# Altium PCB Filtros.PcbDoc
Units mil, origin at the board's own origin, x right, y up, seen from the top; angles counter-clockwise.
Board outline 6000 x 4000 mil, 2 copper layers (Top Layer, Bottom Layer); 110 components, 173 nets, 310 pads, 40 vias.
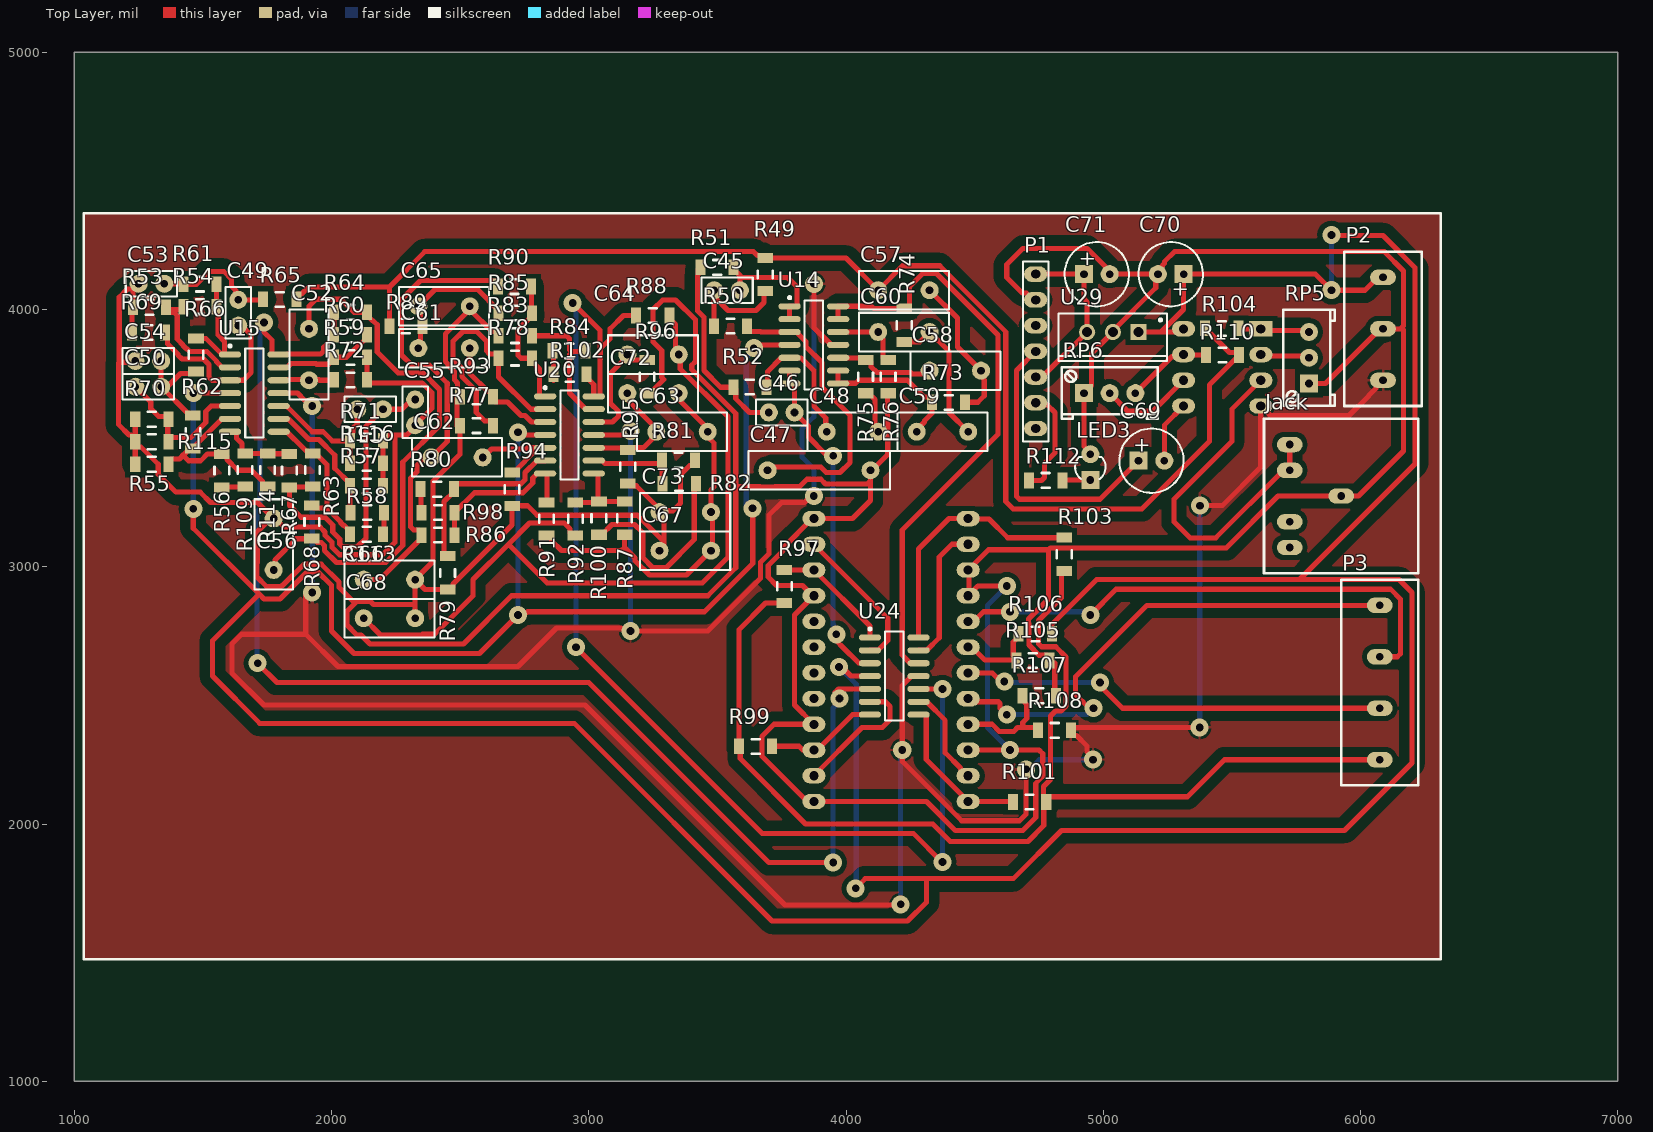
[diagram p0: Top Layer view]
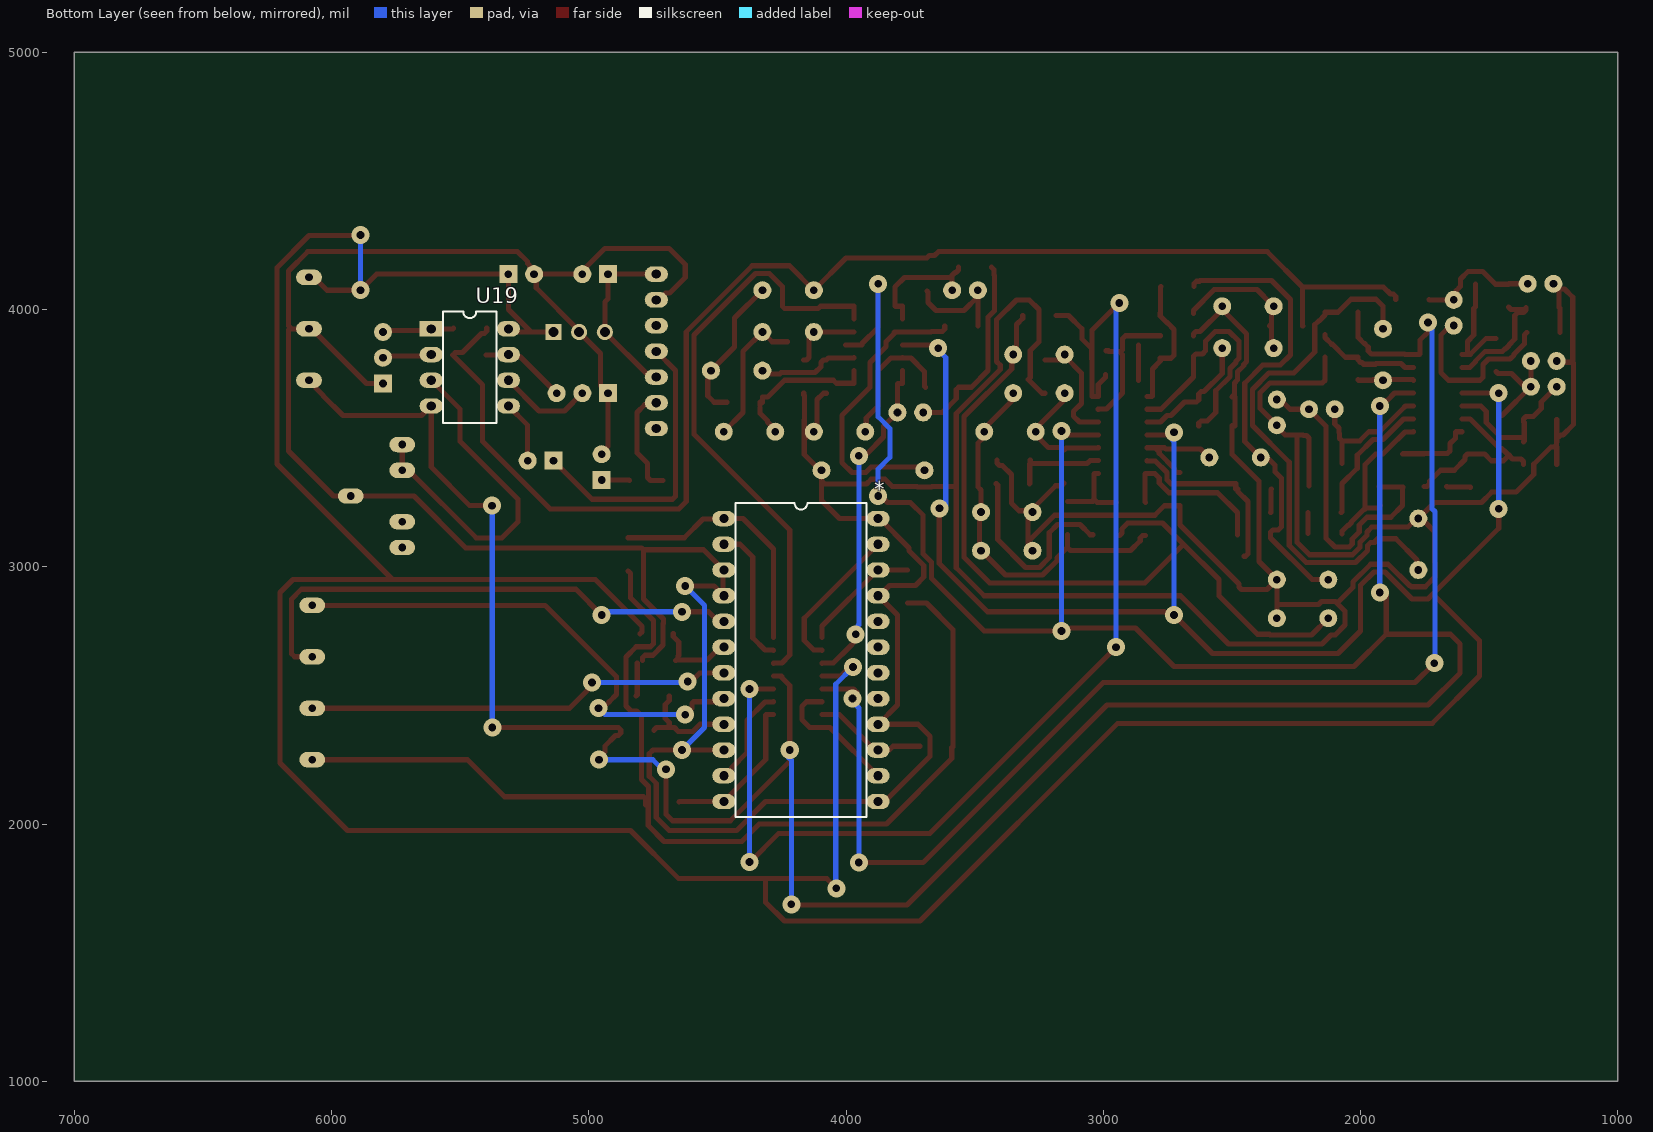
[diagram p1: Bottom Layer view, seen from below]

## Layer stack, top to bottom
Top Solder: solder mask 0.4, Solder Resist, Dk 3.5
Top Layer: signal copper 1.4
Dielectric 1: dielectric 12.6, FR-4, Dk 4.8
Bottom Layer: signal copper 1.4
Bottom Solder: solder mask 0.4, Solder Resist, Dk 3.5

## Board outline
1000,1000 7000,1000 7000,5000 1000,5000

## Design rules (kind name [scope] priority, off if disabled: settings)
Clearance [All] p1: gap=20 ignorepadtopadclearanceinfootprint=TRUE except(0: Arc-Hole Track-Hole SMDPad-Hole THPad-Hole Via-Hole Fill-Hole Poly-Hole Region-Hole Text-Hole; 10: Arc-Arc Arc-Track Arc-SMDPad Track-Track Track-SMDPad SMDPad-SMDPad SMDPad-THPad THPad-THPad; 40: Arc-Fill Arc-Poly Arc-Region Track-Fill Track-Poly Track-Region)
ComponentClearance [All] p1: gap=0 collisioncheckmode=3 verticalgap=0 showdistances=FALSE
PolygonConnect [All] p1: connectstyle=Relief reliefconductorwidth=10 reliefentries=4 polygonreliefangle="90 Angle" airgapwidth=10
RoutingVias [All] p1: holewidth=28 width=50 viastyle="Through Hole" minholewidth=28 minwidth=50 maxholewidth=28 maxwidth=50
SolderMaskExpansion [All] p1: expansion=4 istentingtop=FALSE
Width [All] p1: maxlimit=20 minlimit=20 preferedwidth=20 minimp=50.000000 maximp=50.000000 favimp=50.000000
29 further rules are at their usual default settings.

## Classes and differential pairs
component class "Pasa Banda Superior": C61 C62 C63 C64 C65 C66 C67 C68 C72 C73 R77 R78 R79 R80 R81 R82 R83 R84 R85 R86 R87 R88 R89 R90 R91 R92 R93 R94 R95 R96 R98 R100 R102 U20
component class "Pasa Banda Inferior": C49 C50 C51 C52 C53 C54 C55 C56 R53 R54 R55 R56 R57 R58 R59 R60 R61 R62 R63 R64 R65 R66 R67 R68 R69 R70 R71 R72 R109 R113 R114 R115 R116 U15
component class "Pasa Bajos": C45 C46 C47 C48 R49 R50 R51 R52 U14
component class "Pasa Altos": C57 C58 C59 C60 R73 R74 R75 R76
component class Ganancia: * R97 R99 R101 R103 R105 R106 R107 R108 U24
component class Filtros: C69 C70 C71 Jack LED3 P1 P2 P3 R104 R110 R112 RP5 RP6 U19 U29

## Components (designator, comment, footprint, x,y, rotation, side; value= is the part's Value field where it differs from the comment)
* "AD5206" DIP-24/D31 4175,2637.5 r270 bottom
C45 "Cap" rad-0.1 3537.5,4075 r0 top value=68nF
C46 "Cap" rad-0.1 3750,3600 r0 top value=150nF
C47 "Cap" rad-0.4 3895.14,3375 r180 top value=56nF
C48 "Cap" rad-0.2 4025,3525 r180 top value=22nF
C49 "Cap" rad-0.1 1637.5,3987.5 r270 top value=68nF
C50 "Cap" rad-0.1 1287.5,3700 r180 top value=33nF
C51 "Cap" rad-0.1 2150,3612.5 r180 top value=150nF
C52 "Cap" rad-0.2 1912.5,3825 r270 top value=22nF
C53 "Cap" rad-0.1 1300,4100 r0 top value=68nF
C54 "Cap" rad-0.1 1287.5,3800 r0 top value=33nF
C55 "Cap" rad-0.1 2325,3600 r90 top value=150nF
C56 "Cap" rad-0.2 1775,3087.5 r270 top value=22nF
C57 "Cap" rad-0.2 4225,4075 r180 top value=2.7nF
C58 "Cap" rad-0.2 4425,3762.5 r0 top value=2.7nF
C59 "Cap" rad-0.2 4375,3525 r180 top value=6.8nF
C60 "Cap" rad-0.2 4225,3912.5 r0 top value=6.8nF
C61 "Cap" rad-0.2 2437.5,3850 r0 top value=10nF
C62 "Cap" rad-0.2 2487.5,3425 r0 top value=4.7nF
C63 "Cap" rad-0.2 3362.5,3525 r180 top value=22nF
C64 "Cap" rad-0.2 3250,3825 r180 top value=3.3nF
C65 "Cap" rad-0.2 2437.5,4012.5 r180 top value=10nF
C66 "Cap" rad-0.2 2225,2950 r180 top value=4.7nF
C67 "Cap" rad-0.2 3375,3062.5 r0 top value=22nF
C68 "Cap" rad-0.2 2225,2800 r180 top value=3.3nF
C69 "Cap Pol1" "CAPR D250 H450 R100 mil" 5187.5,3412.5 r0 top value=10uF
C70 "Cap Pol1" "CAPR D250 H450 R100 mil" 5262.5,4137.5 r180 top value=10uF
C71 "Cap Pol1" "CAPR D250 H450 R100 mil" 4975,4137.5 r0 top value=10uF
C72 "Cap" rad-0.2 3250,3675 r180 top value=4.7nF
C73 "Cap" rad-0.2 3375,3212.5 r0 top value=4.7nF
Jack "Jack 3.5mm" "jack 3.5mm" 5725,3475 r270 top
LED3 "Diodo Led" "Led 3mm AMARILLO" 4950,3387.5 r90 top
P1 "Bluetooth audio" HDR1X7 4737.5,3537.5 r90 top
P2 "Header 3" "Bornera 3" 6087.5,4125 r270 top
P3 "Header 4" "Bornera 4" 6075,2250 r90 top
R49 "Res2" "1206 resistor" 3687.5,4137.5 r270 top value=10K
R50 "Res2" "1206 resistor" 3550,3937.5 r0 top value=10K
R51 "Res2" "1206 resistor" 3500,4162.5 r180 top value=10K
R52 "Res2" "1206 resistor" 3625,3700 r0 top value=10K
R53 "Res2" "1206 resistor" 1291,4010.5 r0 top value=10K
R54 "Res2" "1206 resistor" 1487.5,4012.5 r0 top value=10K
R55 "Res2" "1206 resistor" 1300,3400 r0 top value=10K
R56 "Res2" "1206 resistor" 1575,3375 r270 top value=10K
R57 "Res2" "1206 resistor" 2137.5,3312.5 r180 top value=10K
R58 "Res2" "1206 resistor" 2137.5,3212.5 r0 top value=10K
R59 "Res2" "1206 resistor" 2075,3812.5 r180 top value=10K
R60 "Res2" "1206 resistor" 2075,3900 r180 top value=22K
R61 "Res2" "1206 resistor" 1487.5,4100 r0 top value=5.2K
R62 "Res2" "1206 resistor" 1462.5,3525 r270 top value=5.6K
R63 "Res2" "1206 resistor" 1925,3375 r90 top value=2.7K
R64 "Res2" "1206 resistor" 2075,3987.5 r180 top value=8.2K
R65 "Res2" "1206 resistor" 1800,4037.5 r180 top value=10K
R66 "Res2" "1206 resistor" 1475,3825 r270 top value=10K
R67 "Res2" "1206 resistor" 1837.5,3375 r270 top value=10K
R68 "Res2" "1206 resistor" 1925,3175 r270 top value=10K
R69 "Res2" "1206 resistor" 1287.5,3912.5 r0 top value=6.8K
R70 "Res2" "1206 resistor" 1300,3575 r0 top value=15K
R71 "Res2" "1206 resistor" 2137.5,3487.5 r180 top value=8.2K
R72 "Res2" "1206 resistor" 2075,3725 r180 top value=8.2K
R73 "Res2" "1206 resistor" 4400,3637.5 r180 top value=8.2K
R74 "Res2" "1206 resistor" 4225,3937.5 r90 top value=1.5K
R75 "Res2" "1206 resistor" 4075,3737.5 r90 top value=10K
R76 "Res2" "1206 resistor" 4162.5,3737.5 r90 top value=10K
R77 "Res2" "1206 resistor" 2562.5,3550 r0 top value=10K
R78 "Res2" "1206 resistor" 2712.5,3812.5 r0 top value=10K
R79 "Res2" "1206 resistor" 2450,2975 r90 top value=10K
R80 "Res2" "1206 resistor" 2412.5,3300 r180 top value=10K
R81 "Res2" "1206 resistor" 3350,3412.5 r180 top value=10K
R82 "Res2" "1206 resistor" 3350,3325 r0 top value=10K
R83 "Res2" "1206 resistor" 2712.5,3900 r0 top value=10K
R84 "Res2" "1206 resistor" 2925,3837.5 r180 top value=22K
R85 "Res2" "1206 resistor" 2712.5,3987.5 r0 top value=1K
R86 "Res2" "1206 resistor" 2412.5,3125 r0 top value=1K
R87 "Res2" "1206 resistor" 3137.5,3187.5 r90 top value=1K
R88 "Res2" "1206 resistor" 3250,3975 r180 top value=1K
R89 "Res2" "1206 resistor" 2287.5,3937.5 r0 top value=10K
R90 "Res2" "1206 resistor" 2712.5,4087.5 r180 top value=10K
R91 "Res2" "1206 resistor" 2837.5,3187.5 r270 top value=10K
R92 "Res2" "1206 resistor" 2950,3187.5 r270 top value=10K
R93 "Res2" "1206 resistor" 2562.5,3662.5 r0 top value=8.2K
R94 "Res2" "1206 resistor" 2700,3300 r90 top value=10K
R95 "Res2" "1206 resistor" 3150,3387.5 r90 top value=4.7K
R96 "Res2" "1206 resistor" 3225,3737.5 r90 top value=10K
R97 "Res2" "1206 resistor" 3762.5,2925 r270 top value=10K
R98 "Res2" "1206 resistor" 2412.5,3212.5 r0 top value=2.7K
R99 "Res2" "1206 resistor" 3650,2300 r180 top value=10K
R100 "Res2" "1206 resistor" 3037.5,3187.5 r90 top value=1.5K
R101 "Res2" "1206 resistor" 4712.5,2087.5 r0 top value=10K
R102 "Res2" "1206 resistor" 2925,3750 r0 top value=4.7K
R103 "Res2" "1206 resistor" 4850,3050 r270 top value=10K
R104 "Res2" "1206 resistor" 5462.5,3925 r180 top value=10K
R105 "Res2" "1206 resistor" 4725,2637.5 r0 top value=3.3K
R106 "Res2" "1206 resistor" 4737.5,2737.5 r180 top value=10K
R107 "Res2" "1206 resistor" 4750,2500 r0 top value=3.3K
R108 "Res2" "1206 resistor" 4812.5,2362.5 r180 top value=10K
R109 "Res2" "1206 resistor" 1662.5,3375 r90 top value=1K
R110 "Res2" "1206 resistor" 5462.5,3825 r0 top value=10K
R112 "1K" "1206 resistor" 4775,3337.5 r0 top
R113 "Res2" "1206 resistor" 2137.5,3125 r180 top value=1K
R114 "Res2" "1206 resistor" 1750,3375 r90 top value=1K
R115 "Res2" "1206 resistor" 1300,3487.5 r0 top value=15K
R116 "Res2" "1206 resistor" 2137.5,3400 r180 top value=8.2K
RP5 "Trimpot" "Trimpot Multivuelta Vertical" 5800,3812.5 r270 top
RP6 "Trimpot" "Trimpot Multivuelta Vertical" 5025,3675 r180 top
U14 "TL084ACD" 751A-02_N 3875,3862.5 r0 top
U15 "TL084ACD" 751A-02_N 1700,3675 r0 top
U19 "TL082ACJG" 693-02 5462.5,3775 r270 bottom
U20 "TL084ACD" 751A-02_N 2925,3512.5 r0 top
U24 "TL084ACD" 751A-02_N 4187.5,2575 r0 top
U29 "LM78M05CT/NOPB" T03B 5037.5,3912.5 r180 top

## Footprints (in the part's own frame and the unit in brackets; to place one, negate y for a bottom-side part, rotate by r counter-clockwise, add the part's x,y. Pads: shape width x height; smd on the part's side, far side on the other; paste and mask are expansions set on the pad)
693-02 [mil] "DIP; 8 Leads; Row Spacing 7.62 mm; Pitch 2.54 mm"
  rect 60x90 hole 35.43: 1(-150,-150)
  oval 60x90 hole 35.43: 2(-50,-150) 3(50,-150) 4(150,-150) 5(150,150) 6(50,150) 7(-50,150) 8(-150,150)
  silkscreen extent -217,-104 217,104
751A-02_N [mm] "SOIC, 14-Leads, Body 8.7x3.9mm, Pitch 1.27mm, IPC Medium Density"
  oval 2.2x0.6 smd: 1(-2.4,3.81) 2(-2.4,2.54) 3(-2.4,1.27) 4(-2.4,0) 5(-2.4,-1.27) 6(-2.4,-2.54) 7(-2.4,-3.81) 8(2.4,-3.81) 9(2.4,-2.54) 10(2.4,-1.27) 11(2.4,0) 12(2.4,1.27) 13(2.4,2.54) 14(2.4,3.81)
  silkscreen extent -2.52,-4.4 0.9,4.78, body extent -1.95,-4.33 1.95,4.33, height 1.75
"1206 resistor" [mil]
  rect 39x61 smd: 1(-63,-2) 2(66,-2)
  silkscreen extent -14,-30 16,27
"Bornera 3" [mil]
  oval 60x100 hole 30: 1(0,0) 2(200,0) 3(400,0)
  silkscreen extent -100,-150 500,150
"Bornera 4" [mil]
  oval 60x100 hole 30: 1(0,0) 2(200,0) 3(400,0) 4(600,0)
  silkscreen extent -100,-150 700,150
"CAPR D250 H450 R100 mil" [mil]
  rect 70x70 hole 30: 1(-50,0)
  round 70 hole 30: 2(50,0)
  silkscreen extent -125,-125 125,125, body extent -134,-133 133,133, height 98
DIP-24/D31 [mil]
  oval 60x90 hole 35.43: 1(-550,-300) 2(-450,-300) 3(-350,-300) 4(-250,-300) 5(-150,-300) 6(-50,-300) 7(50,-300) 8(150,-300) 9(250,-300) 10(350,-300) 11(450,-300) 12(550,-300) 13(550,300) 14(450,300) 15(350,300) 16(250,300) 17(150,300) 18(50,300) 19(-50,300) 20(-150,300) 21(-250,300) 22(-350,300) 23(-450,300) 24(-550,300)
  silkscreen extent -610,-254 610,254
HDR1X7 [mil] "Connector; Header; 7 Position"
  oval 60x90 hole 35.43: 1(0,0) 2(100,0) 3(200,0) 4(300,0) 5(400,0) 6(500,0) 7(600,0)
  silkscreen extent -50,-50 650,50
"jack 3.5mm" [mil]
  oval 60x100 hole 30: 1(0,0) 1(100,0) 2(300,0) 2(400,0) 3(200,200)
  Top Layer region: 400,400
  silkscreen extent -100,-100 500,500
"Led 3mm AMARILLO" [mil]
  rect 70x70 hole 30: 1(-50,0)
  round 70 hole 30: 2(50,0)
  silkscreen extent -47,-59 39,59, body extent -65,-65 65,64, height 217
rad-0.1 [mil] "Radial Cap, Thru-Hole; 2 Leads; 0.1 in Pin Spacing"
  round 70 hole 30: 1(-50,0) 2(50,0)
  silkscreen extent -100,-50 100,50
rad-0.2 [mil] "Radial Cap, Thru-Hole; 2 Leads; 0.2 in Pin Spacing"
  round 70 hole 30: 1(-100,0) 2(100,0)
  silkscreen extent -175,-75 175,75
rad-0.4 [mil] "Radial Cap, Thru-Hole; 2 Leads; 0.4 in Pin Spacing"
  round 70 hole 30: 1(-200,0) 2(200,0)
  silkscreen extent -275,-75 275,75
T03B [mm] "TO, Thru-Hole, Vertical, Heatsink Mounted; 3 In-Line Leads; Pitch 2.54 mm"
  rect 1.6x1.6 hole 1: 1(-2.54,0)
  round 1.6 hole 1: 2(0,0) 3(2.54,0)
  silkscreen extent -5.35,-1.85 5.35,2.85, body extent -5.4,-1.9 5.4,2.9, height 19.4
"Trimpot Multivuelta Vertical" [mil] "Preset Multivuelta de ajuste vertical"
  rect 70x70 hole 30: 1(100,0)
  round 70 hole 30: 2(-100,0) 3(0,0)
  silkscreen extent -187,-100 187,100, body extent -181,-95 181,94, height 475

## Part data
C45 C46 C47 C48 C49 C50 C51 C52 C53 C54 C55 C56 C57 C58 C59 C60 C61 C62 C63 C64 C65 C66 C67 C68 C72 C73: "Capacitor", LatestRevisionDate=17-Jul-2002, LatestRevisionNote="Re-released for DXP Platform.", PackageDescription="Radial Cap, Thru-Hole; 2 Leads; 0.3 in Pin Spacing", PackageReference=RAD-0.3, Published=8-Jun-2000, Publisher="Altium Limited"
C69 C70 C71: "Polarized Capacitor (Radial)", LatestRevisionDate=17-Jul-2002, LatestRevisionNote="Re-released for DXP Platform.", PackageDescription="Polarized Capacitor (Radial); 2 Leads", PackageReference=RB7.6-15, Published=8-Jun-2000, Publisher="Altium Limited"
LED3: "Led 3mm", VALOR="Led Xmm (COLOR)"
P1: library part "Header 7", "Header, 7-Pin", LatestRevisionDate=17-Jul-2002, LatestRevisionNote="Re-released for DXP Platform.", Publisher="Altium Limited"
P2: "Header, 3-Pin", LatestRevisionDate=17-Jul-2002, LatestRevisionNote="Re-released for DXP Platform.", Publisher="Altium Limited"
P3: "Header, 4-Pin", LatestRevisionDate=17-Jul-2002, LatestRevisionNote="Re-released for DXP Platform.", Publisher="Altium Limited"
R49 R50 R51 R52 R53 R54 R55 R56 R57 R58 R59 R60 R61 R62 R63 R64 R65 R66 R67 R68 R69 R70 R71 R72 R73 R74 R75 R76 R77 R78 R79 R80 R81 R82 R83 R84 R85 R86 R87 R88 R89 R90 R91 R92 R93 R94 R95 R96 R97 R98 R99 R100 R101 R102 R103 R104 R105 R106 R107 R108 R109 R110 R113 R114 R115 R116: "Resistor", LatestRevisionDate=17-Jul-2002, LatestRevisionNote="Re-released for DXP Platform.", PackageDescription="Axial Device, Thru-Hole; 2 Leads; 0.4 in Pin Spacing", PackageReference=AXIAL-0.4, Published=8-Jun-2000, Publisher="Altium Limited"
R112: library part Res2, "Resistor", LatestRevisionDate=17-Jul-2002, LatestRevisionNote="Re-released for DXP Platform.", PackageDescription="Axial Device, Thru-Hole; 2 Leads; 0.4 in Pin Spacing", PackageReference=AXIAL-0.4, Published=8-Jun-2000, Publisher="Altium Limited"
RP5 RP6: "Preset", VALOR=1K
U14 U15 U19 U20 U24: "JFET-Input Operational Amplifier", ComponentLink1Description="Manufacturer Link", ComponentLink1URL=http://www.onsemi.com/site/products/parametrics/0,4446,251,00.html, DatasheetVersion=1988, Published=17-Jul-2002, Publisher="Altium Limited"
  U14 U15 U20 U24: Code_IPC=SOIC127P600-14, LatestRevisionDate=13-Apr-2006, LatestRevisionNote="IPC-7351 Footprint Added.", PackageDescription="14-Pin Small Outline Integrated Circuit 1.27 mm Pitch", PackageReference=751A-02, PackageVersion=1991
  U19: Code_JEDEC=MO-001-AN, LatestRevisionDate=06-Jun-2005, LatestRevisionNote="Stylized 3D Model Added.", PackageDescription="DIP; 8 Leads; Row Spacing 7.62 mm; Pitch 2.54 mm", PackageReference=693-02
U29: "3-Terminal Positive Voltage Regulators, 3-pin TO-220, Pb-Free", Manufacturer="National Semiconductor", PackageTopMarking=NSUZXYTTE#*LM341T-5.0*LM78M05CT, PowerWise=N, Supplier Part Number 1=LM78M05CT-ND, ComponentLink1Description="LM78M05 Datasheet", ComponentLink1URL=http://www.national.com/ds/LM/LM78M05.pdf, ComponentLink2Description="LM78M05 Web Page", ComponentLink2URL=http://www.national.com/pf/LM/LM78M05.html, ComponentLink3Description="T03B Package Page", ComponentLink3URL=http://www.national.com/packaging/folders/t03b.html, CompType="LDO IC", DatasheetVersion=Aug-2005, PackageDescription="TO-220, Molded, 3 Lead, Straight", PackageReference=T03B, PackageVersion="revL, Jan-1992", PartNumber=LM78M05CT/NOPB, PinCount=3, Published=1-Mar-2010, Publisher="Altium Limited", RoHS=Y, Supplier 1=Digi-Key, Supplier 2=Farnell, Supplier Part Number 2=1685493

## Via types
v1: diameter 70, hole 30, Top Layer to Bottom Layer, 40 vias

## Nets (pads, with @x,y where several pads share a name; then routed paths per layer and width w, separated by ;. In a path a pad name is that pad's centre, name@x,y a point inside that pad or via, vN(x,y) a via of type N, cw(c..) or ccw(c..) an arc to the next point about the centre after c; other vN are vias at no path point)
12V: *.3 *.4 *.10 *.13 *.16 *.21 *.24 C47.1 C48.1 C53.1 C54.1 C55.1 C56.1 C65.1 C66.1 C67.1 C68.1 C70.2 C71.2 C73.1 Jack.3 LED3.2 P1.6 P2.2 R53.1 R55.1 R57.1 R59.1 R69.1 R70.1 R71.1 R72.1 R75.1 R76.1 R77.1 R79.1 R81.1 R83.1 R93.1 R94.1 R95.1 R96.1 R105.2 R107.2 R115.1 R116.1 RP5.1 RP6.1 U29.2 | length 23329.3
  Top Layer w20: C53.1@1222.64,4080.02 1207.09,4080.02 1175,4047.93 1175,3794.79 ; R69.1 1224.5,4005 R53.1 1228,4074.66 1250,4096.66 C53.1 ; R115.1@1227.5,3506 1221,3512.5 1212.5,3512.5 1172.5,3552.5 1172.5,3792.29 1175,3794.79 ; R55.1 R115.1@1237,3465 ; R115.1 1237,3506 R70.1 ; C54.1 1232.29,3794.79 1175,3794.79 ; R115.1@1238.25,3485.5 1238.25,3473.25 1246.5,3465 1260,3465 1326.5,3398.5 1326.5,3359.22 1395.72,3290 1489.42,3290 1529.42,3250 1712.5,3250 C56.1@1768.75,3193.75 ; C56.1 1762.5,3187.5 1762.5,3182.37 1755.96,3175.83 1750.83,3175.83 1712.5,3137.5 1712.5,3016.92 1710,3014.42 1710,2960.58 1748.08,2922.5 1801.92,2922.5 1804.42,2925 1807.57,2925 1892.57,3010 1960.21,3010 2029.69,2940.52 2029.69,2919.48 2091.12,2858.05 ; C56.1@1782.37,3187.5 1815.87,3154 1956.28,3154 1975,3135.28 1975,3122.63 2002,3095.63 2002,3075.79 2031.29,3046.5 2198.28,3046.5 2247,3095.22 2247,3512.5 ; R59.1 R72.1 2138,3724.5 2147.5,3715 2351.92,3715 2390,3676.92 2390,3615 C55.1 2325,3544.87 2292.63,3512.5 2247,3512.5 ; R57.1 R116.1 R71.1 2200.5,3500.5 2210,3510 2221,3510 2223.5,3512.5 2247,3512.5 ; C68.1 2325,2853.62 ; R93.1@2488.11,3660.5 2488.11,3548 R77.1 2499.5,3437 2395,3332.5 2395,3020 C66.1 ; R93.1 2490,3670 2490,3714.15 2477.5,3726.65 2477.5,3758.12 2453.88,3781.74 2453.88,3786.77 2442.5,3798.15 2442.5,3905 C65.1@2537.5,4000 ; C65.1 C65.1@2537.5,4000 ; R83.1 2649.5,3904.72 2640,3914.22 2623.28,3914.22 C65.1@2537.5,4000 ; R95.1 3161.5,3315 3185,3315 3268.31,3231.69 3268.31,3219.19 C73.1@3279.34,3208.16 ; R96.1 3238,3674.5 3291.62,3728.12 3283.88,3735.87 3283.88,3841.12 3250,3875 3250,4000 3287.5,4037.5 3337.5,4037.5 3415,3960 3415,3798.08 3400.46,3783.54 3400.46,3766.97 3571.12,3596.3 3571.12,3320.26 3575,3316.38 3571.12,3312.5 ; C67.1 3289.85,3077.35 3291.84,3077.35 3291.84,3097.87 ; C73.1 C73.1@3279.34,3208.16 ; C73.1@3291.84,3217.71 3327.58,3217.71 3357.09,3247.22 3357.09,3358.59 3392.5,3394 3403.5,3394 3413,3403.5 R81.1 ; *.21@3867.53,2887.5 3867.53,2880.03 3800,2812.5 3800,2462.5 *.16 3720.22,2387.5 3673.5,2340.78 3673.5,2263.22 3849.22,2087.5 *.13 4312.5,2087.5 4425,1975 4687.5,1975 4737.5,2025 4737.5,2158.08 4765,2185.58 4765,2273.28 4750.78,2287.5 v1(4637.5,2287.5) *.10 ; *.21 3871,2887.5 3830.91,2927.59 3730.12,2927.59 3697.5,2960.22 3697.5,3005.07 3755,3062.57 3755,3073.28 *.24@3869.22,3187.5 ; *.24 *.24@3869.22,3187.5 ; R75.1 4088,3674.5 4112.19,3650.31 4112.19,3552.05 4125,3539.23 C48.1 ; C48.1@4132.37,3525 4162.5,3494.87 ; R76.1 4164.5,3668.49 4161.01,3665 4161.01,3571.57 4162.5,3570.08 4162.5,3494.87 ; *.10@4467.53,2294.97 *.10@4467.53,2305.54 ; v1(4625,2925) 4512.5,2925 4477.99,2890.49 4477.99,2984.51 *.3 4553.74,3066.24 4787.5,3066.24 ; P1.6 4726.93,4037.5 4700.76,4063.68 4686.32,4063.68 4625,4125 4625,4175 4687.5,4237.5 4937.5,4237.5 5016.77,4158.23 5016.77,4145.73 C71.2 5204.27,4137.5 C70.2 ; R105.2 4791,2646.5 4781.5,2656 4750.79,2656 4711,2695.79 4711,2778.28 4709.18,2780.11 4709.18,2796.68 4787.5,2875 4787.5,3066.24 ; 4811.61,2625 4811.61,2502.39 R107.2 ; LED3.2 4950,3443.74 4925,3468.74 RP6.1 4954.37,3704.37 4954.37,3829.37 U29.2 5037.5,3917.92 5204.27,4084.69 5204.27,4129.27 C70.2 ; RP5.1 5864.22,3712.5 6070.47,3918.75 P2.2@6087.5,3918.75 ; P2.2 6102.93,3925 6162.5,3925 6167.5,3920 6167.5,3450 5992.5,3275 Jack.3 5679.93,3275 5478.43,3073.5 4794.76,3073.5 4787.5,3066.24 ; 6155.78,3925 6167.5,3936.72 6167.5,4149.85 6092.35,4225 5276.99,4225 5237.5,4185.51 5237.5,4178.5 5230.46,4171.46 5230.46,4168.99 5212.5,4151.03 C70.2 ; 2325,2853.62 2163.3,2853.62 2151.92,2865 2098.08,2865 2060,2826.92 2060,2773.08 2098.08,2735 2114.17,2735 2149.17,2700 2512.5,2700 2700,2887.5 3462.5,2887.5 3571.12,2996.12 3571.12,3312.5 ; 2325,2853.62 C66.1 ; C66.1 2363,2912 R79.1 2463,2912 2472.5,2921.5 2472.5,2932.5 2702,3162 R94.1 2762.5,3237 2799.5,3200 3189.72,3200 3291.84,3097.87 ; C73.1@3279.34,3208.16 3291.84,3208.16 3291.84,3097.87 ; 3571.12,3312.5 3665.72,3312.5 3668.22,3310 3722.06,3310 3724.56,3312.5 3820.58,3312.5 3848.08,3340 3901.92,3340 3920.55,3321.38 4082.25,3321.38 4095.14,3334.26 ; *.24@3869.22,3187.5 4025,3187.5 4095.14,3257.64 4095.14,3334.26 ; 4095.14,3334.26 C47.1 4101.59,3375 4162.5,3435.91 4162.5,3494.87
  Bottom Layer w20: v1(4625,2925) 4550,2850 4550,2375 v1(4637.5,2287.5)
24V: C70.1 P2.1 R106.1 U14.4 U15.4 U19.8 U20.4 U24.4 U29.1 | length 17742.9
  Top Layer w20: v1(1462.5,3225) 1462.5,3150 1718.75,2893.75 ; v1(1462.5,3675) U15.4 ; v1(2725,3522.5) 2738.53,3522.5 2748.53,3512.5 U20.4 ; v1(3636.12,3227.18) 3637.5,3225.81 3637.5,3012.5 3450,2825 2761.72,2825 2758.78,2822.07 2734.57,2822.07 v1(2725,2812.5) 2575,2662.5 2087.5,2662.5 1999.69,2750.31 1999.69,2928.09 1947.78,2980 1905,2980 1800,2875 1737.5,2875 1718.75,2893.75 ; v1(3641.89,3850) 3658.78,3850 3671.28,3862.5 U14.4 ; v1(3972.79,2610.29) 3984.42,2610.29 4019.7,2575 U24.4 ; v1(4037.5,1750) 4075,1787.5 4312.5,1787.5 ; R106.1 4793.43,2746.57 4793.43,2768.43 4975,2950 5762.5,2950 ; U29.1 5225,3912.5 ; U19.8 5305.03,3917.53 5278,3917.53 5272.97,3912.5 5225,3912.5 ; v1(5887.5,4290) 5890,4287.5 6087.5,4287.5 6212.5,4162.5 6212.5,3400 5762.5,2950 ; v1@5893.24,4069.26 5825,4137.5 C70.1 5312.5,4000 5225,3912.5 ; v1@5893.24,4072.62 5895.62,4075 6017.5,4075 6067.5,4125 P2.1 ; 1718.75,2893.75 1537.5,2712.5 1537.5,2575 1721.21,2391.29 2943.71,2391.29 3712.5,1622.5 4239.42,1622.5 4312.5,1695.58 4312.5,1787.5 ; 4312.5,1787.5 4650,1787.5 4837.5,1975 5937.5,1975 6200,2237.5 6200,2900 6150,2950 5762.5,2950
  Bottom Layer w20: v1(1462.5,3225) v1(1462.5,3675) ; v1(2725,2812.5) 2725,3485.78 2728.01,3488.79 2728.01,3519.49 v1(2725,3522.5) ; v1(3636.12,3227.18) 3624.22,3227.18 3612.5,3238.9 3612.5,3813.28 3641.89,3842.68 v1(3641.89,3850) ; v1(3972.79,2610.29) 4040,2543.08 4040,1757.8 4037.5,1755.3 v1(4037.5,1750) ; v1(5887.5,4075) v1(5887.5,4290)
32V: 
64V: 
A1: *.22 R97.1 U24.1 | length 468.2
  Top Layer w20: R97.1 3760.75,2987.75 3874.75,2987.75 *.22 ; *.22@3874.5,2988 4093.01,2769.49 U24.1
A2: *.15 R99.1 U24.7 | length 443
  Top Layer w20: R99.1 3817.47,2302 3831.97,2287.5 3885.57,2287.5 3898.63,2300.56 3900.56,2300.56 4025,2425 U24.7
A3: *.12 R101.1 U24.8 | length 609.4
  Top Layer w20: U24.8 4310.31,2425 4311.99,2423.33 4311.99,2250.51 *.12 4647.5,2087.5 R101.1
A4: *.1 R103.1 U24.14 | length 990.2
  Top Layer w20: U24.14 4281.99,3069.49 4400,3187.5 *.1 4477,3185.5 4556.01,3185.5 4628.51,3113 R103.1
Bluetooth: C69.2 U19.5 | length 243.6
  Top Layer w20: C69.2 5237.5,3550 U19.5
CLK: *.8 P3.4 | length 1994.4
  Top Layer w20: *.8 4482.47,2480.03 4501.22,2480.03 4506.24,2475 4592.5,2475 4599.26,2468.24 4599.26,2448.37 4622.63,2425 v1(4625,2425) ; v1(4962.5,2450) 4945.62,2450 4920.62,2475 4892.5,2503.12 4892.5,2572.78 5169.72,2850 P3.4
  Bottom Layer w20: v1(4625,2425) 4937.5,2425 4950,2437.5 v1(4962.5,2450)
CS: *.5 P3.3 | length 2055.7
  Top Layer w20: *.5 4496.72,2787.5 4534.22,2825 v1(4637.5,2825) ; v1(4950,2812.5) 5050,2912.5 6117.35,2912.5 6155,2874.85 6155,2661.72 6143.28,2650 P3.3
  Bottom Layer w20: v1(4637.5,2825) 4937.5,2825 v1(4950,2812.5)
GND: P2.3 R108.1 U14.11 U15.11 U19.4 U20.11 U24.11 | length 13777
  Top Layer w20: U15.11 1867.8,3675 1897.05,3645.74 1941.76,3645.74 1933.52,3637.5 1925,3646.02 v1(1925,3625) ; v1(1925,2900) 1925,2920.5 1900,2895.5 1900,2737.5 ; U20.11 3141.88,3512.5 3154.38,3525 3159.5,3525 v1(3162.5,3528) ; v1(3875,3275) 3863.28,3275 3838.28,3250 3750,3250 3700,3200 3700,3050 3667.5,3017.5 3667.5,2955 3462.5,2750 v1(3162.5,2750) 3152.93,2759.57 3128.72,2759.57 3125.78,2762.5 2875,2762.5 2725,2612.5 2025,2612.5 1900,2737.5 ; v1(3875,4100) 3875,3930.5 3937.3,3868.21 3937.3,3864.17 3938.97,3862.5 U14.11 U14.11@4001.96,3862.5 ; v1(4212.5,1687.5) 4212.5,1711.72 4185.78,1685 3762.5,1685 2985,2462.5 1737.5,2462.5 1612.5,2587.5 1612.5,2700 1650,2737.5 1900,2737.5 ; U24.11 4251.47,2575 4249.8,2573.33 4249.8,2569.29 4218.68,2538.18 v1(4218.68,2287.5) 4218.68,2243.82 4450,2012.5 4675,2012.5 4700,2037.5 v1(4700,2212.5) ; R108.1 R108.1@4875.5,2365.5 ; v1(4960,2250.05) 4960,2258.17 4937.5,2280.67 4937.5,2302.5 4896,2344 4885,2344 4875.5,2353.5 R108.1@4875.5,2365.5 ; v1(5375,2375) 4885,2375 R108.1@4875.5,2365.5 ; v1(5375.86,3237.5) 5462.5,3237.5 5612.5,3387.5 U19.4 5650,3587.5 5955,3587.5 6033.8,3666.3 6033.8,3667.97 6059.85,3694.02 6059.85,3706.52 6078.32,3725 P2.3
  Bottom Layer w20: v1(1925,2900) v1(1925,3625) ; v1(3162.5,2750) v1(3162.5,3528) ; v1(3875,3275) 3875,3380.16 3829.58,3425.58 3829.58,3537.66 3875,3583.08 v1(3875,4100) ; v1(4212.5,1687.5) 4212.5,2248.28 4225,2260.78 4224.42,2261.36 4224.42,2281.76 v1(4218.68,2287.5) ; v1(4700,2212.5) 4713.53,2212.5 4751.08,2250.05 v1(4960,2250.05) ; v1(5375,2375) 5375,3223.28 5389.22,3237.5 v1(5375.86,3237.5)
"Logic supply": C71.1 P1.3 P1.7 U29.3 | length 690.2
  Top Layer w20: P1.3 4744.97,3744.97 4769.97,3744.97 U29.3 4937.5,4029.67 4925,4042.17 C71.1 P1.7
Net*1_2: 
Net*1_3: 
Net*1_5: 
Net*1_6: 
Net*1_7: 
Net*1_10: 
Net*_6: *.6 R105.1 R106.2 | length 324.4
  Top Layer w20: *.6 4490,2687.5 4540.57,2636.93 4652.5,2636.93 R105.1@4652.5,2645 ; R105.1 R105.1@4652.5,2645 ; R106.2 4671.5,2728.5 4650,2707 4650,2655.22 4652.5,2652.72 R105.1@4652.5,2645
Net*_9: *.9 R107.1 R108.2 | length 430.1
  Top Layer w20: *.9 4568.2,2387.5 4595.7,2360 4651.92,2360 4666.92,2375 4687.5,2375 ; R107.1 4687,2479.92 4702.5,2464.42 4702.5,2410.58 4687,2395.08 4687,2375.5 4687.5,2375 ; R108.2 4746.5,2365.5 4737,2375 4687.5,2375
Net_2: 
Net_3: 
Net_4: 
Net_6: 
Net_7: 
Net_10: 
Net_11: 
Net_12: 
NetC1_1: 
NetC2_1: 
NetC2_2: 
NetC3_1: 
NetC3_2: 
NetC4_2: 
NetC5_2: 
NetC6_2: 
NetC7_2: 
NetC8_1: 
NetC8_2: 
NetC9_1: 
NetC9_2: 
NetC11_1: 
NetC12_2: 
NetC15_2: 
NetC16_2: 
NetC17_2: 
NetC18_1: 
NetC18_2: 
NetC19_1: 
NetC19_2: 
NetC21_2: 
NetC22_2: 
NetC24_2: 
NetC33_1: 
NetC33_2: 
NetC34_1: 
NetC34_2: 
NetC38_2: 
NetC39_2: 
NetC40_2: 
NetC42_1: 
NetC45_1: C45.1 R49.2 R50.1 | length 414
  Top Layer w20: R50.1 C45.1@3487,4050 ; C45.1 3487.5,4050 3541.12,3996.38 3650,3996.38 3681,4027.38 3681,4067 R49.2
NetC45_2: C45.2 R51.1 U14.1 U14.2 | length 494.5
  Top Layer w20: R51.1 3563,4153.5 3572.5,4144 3575.78,4144 3587.5,4132.28 ; C45.2 3587.5,4132.28 ; U14.2 U14.1 3807.34,4012.5 3809.02,4014.17 3809.02,4088.16 3772.17,4125 3594.78,4125 3587.5,4132.28
NetC46_1: C46.1 R51.2 R52.1 | length 757.1
  Top Layer w20: R51.2 3424.5,4155 3424.5,4134.28 3422.5,4132.28 3422.5,3994.93 3447.5,3969.93 3447.5,3763 3512.5,3698 R52.1 3571.5,3688.5 3571.5,3653.5 3625,3600 C46.1
NetC46_2: C46.2 U14.6 U14.7 U24.3 | length 1316.1
  Top Layer w20: U14.6 U14.7 3798.33,3712.5 3800,3710.83 C46.2 3853.82,3546.18 3853.82,3504.25 3917.26,3440.82 3940.43,3440.82 v1(3950,3431.25) ; v1(3962.5,2737.5) 3968.24,2731.76 3968.24,2706.76 3985,2690 4049.31,2625.69 4052.5,2625.69 4092.32,2625.69 U24.3
  Bottom Layer w20: v1(3950,3431.25) 3950,2774.22 3952.93,2771.28 3952.93,2747.07 v1(3962.5,2737.5)
NetC47_2: C47.2 R50.2 U14.3 | length 1154.2
  Top Layer w20: R50.2 3616,3924.5 3625.5,3915 3667.6,3915 3670.1,3912.5 U14.3 3811.03,3912.5 3812.7,3910.83 3812.7,3906.79 3843.82,3875.68 3843.82,3856.18 3906.18,3793.82 3906.18,3697.96 4016.12,3588.02 4016.12,3405.45 3976.92,3366.25 3923.08,3366.25 3901.83,3387.5 3715.01,3387.5 3702.51,3375 C47.2
NetC48_2: C48.2 R52.2 U14.5 | length 543.4
  Top Layer w20: R52.2 3695.02,3702.02 3695.02,3758.5 3747.83,3811.32 3779.33,3811.32 U14.5 3781.2,3811.81 3825.69,3811.81 3875,3762.5 3875,3625 3921.38,3578.62 3921.38,3528.62 C48.2
NetC49_1: C49.1 C53.2 R61.1 R65.2 | length 484.6
  Top Layer w20: C53.2 1422.5,4100 R61.1 1475.22,4098 1525.72,4148.5 1581.28,4148.5 1610.86,4118.93 1610.86,4090.17 1627.93,4073.1 1627.93,4047.07 C49.1 1732,4037.5 R65.2
NetC49_2: C49.2 R69.2 U15.3 | length 685.4
  Top Layer w20: R69.2 1363,3901 1363,3866.42 1402.5,3826.92 1402.5,3823.33 1418.33,3807.5 1502.78,3807.5 1523.5,3786.78 1523.5,3736.72 1535.22,3725 U15.3 1657.43,3725 1687.5,3755.07 1687.5,3900 1650,3937.5 C49.2
NetC50_1: C50.1 C54.2 R62.1 R66.2 | length 429.3
  Top Layer w20: C54.2 C50.1 ; R62.1 1449.5,3588 1440,3597.5 1343.75,3693.75 C50.1 ; R66.2 1464.93,3750.93 1412.5,3750.93 1366.27,3704.7 1342.2,3704.7 C50.1
NetC50_2: C50.2 R70.2 R115.2 U15.5 | length 596.6
  Top Layer w20: C50.2 1297.3,3640.2 1297.3,3615.2 1328.22,3584.28 1356.5,3584.28 1366,3574.78 R70.2 ; R70.2@1363.08,3561.42 1363.08,3501.85 R115.2@1363.08,3493.17 ; R115.2 1363.08,3488.42 R115.2@1363.08,3493.17 ; R70.2@1366,3563.5 R70.2@1366.08,3563.42 ; U15.5 1532.2,3625 1511.13,3603.93 1511.13,3560.35 1452.63,3501.85 1371.76,3501.85 R115.2@1363.08,3493.17
NetC51_1: C51.1 C55.2 R63.1 R67.2 | length 1240.3
  Top Layer w20: R67.2 R67.2@1837,3310.5 ; R63.1 1925.5,3310.5 R67.2@1837,3310.5 ; C55.2 2311.47,3650 2273.97,3612.5 C51.1 2133.62,3546.12 2133.62,3110.83 2099.28,3076.5 2043.72,3076.5 2032,3088.22 2032,3108.06 2005,3135.06 2005,3162.43 1974.93,3192.5 1882.5,3192.5 1837,3238 R67.2@1837,3310.5
NetC51_2: C51.2 R71.2 R116.2 U15.10 | length 555.4
  Top Layer w20: U15.10 1825,3625 1827.8,3622.21 1925,3525 1967.43,3525 2002.93,3489.5 R71.2 ; R116.2 R71.2 ; C51.2 2100,3554.93 2084,3538.93 2084,3521.72 2081,3518.72 2081,3499 R71.2
NetC52_1: C52.1 C56.2 R64.1 R68.2 | length 2135.1
  Top Layer w20: C56.2 1780.21,2992.71 1780.21,3026.71 1862.5,3109 R68.2 ; C52.1 1912.5,4012.5 1940,4040 2036.78,4040 2087.28,3989.5 R64.1 2138,3978.5 2161.64,3954.86 2163.43,3954.86 2177.5,3940.78 2177.5,3835 2258.62,3753.88 2355.47,3753.88 2420,3689.35 2420,3549.42 2277,3406.42 2277,3082.79 2210.71,3016.5 2018.86,3016.5 1972,3063.36 1972,3083.21 1960.21,3095 1943.5,3095 1943.5,3099.5 1934,3109 R68.2@1926,3109
NetC52_2: C52.2 R72.2 U15.12 | length 219.9
  Top Layer w20: U15.12 1796.99,3727.5 C52.2@1912.5,3727.5 ; C52.2 C52.2@1912.5,3727.5 ; R72.2 2007,3725 1954.42,3725 1951.92,3727.5 C52.2@1912.5,3727.5
NetC57_1: C57.1 C58.2 R73.1 | length 574.5
  Top Layer w20: C57.1 4433.07,3966.93 4433.07,3854.43 C58.2 ; R73.1 4512.5,3639.5 4537.5,3664.5 4537.5,3726.44 4534.57,3729.38 4534.57,3752.93 C58.2@4531.25,3756.25
NetC57_2: C57.2 R49.1 R65.1 R89.1 R104.2 R110.2 | length 5324.9
  Top Layer w20: R65.1 1863,4050.5 1872.5,4060 1883.5,4060 1911.5,4088 2225,4088 ; R89.1 2225,3936 2225,4088 ; R104.2 5396.5,3916 5406,3906.5 5417,3906.5 5490.72,3832.78 R110.2@5519,3832.78 ; R110.2 5412.5,3707 5412.5,3487.5 5150,3225 4650,3225 4621.12,3253.88 4621.12,3913.23 4364.35,4170 4220,4170 C57.2 4000,4200 3686,4200 3676,4210 3655.78,4210 3640.78,4225 2362,4225 2225,4088
NetC58_1: C58.1 R75.2 U14.10 | length 396.7
  Top Layer w20: U14.10 3970.18,3811.81 4068.69,3811.81 R75.2 4088,3803.5 4097.5,3794 4097.5,3777.5 4120,3755 4251.93,3755 4256.93,3750 4313.28,3750 4325,3761.72 C58.1
NetC59_1: C59.1 C60.2 R74.1 | length 563.4
  Top Layer w20: R74.1 4287,3874.5 C60.2 4400,3837.5 4400,3600 C59.1
NetC59_2: C59.2 R73.2 U14.8 U14.9 | length 587.8
  Top Layer w20: U14.9 U14.8 3970.18,3713.19 4037.41,3713.19 4049.22,3725 4239.5,3725 4304.5,3660 4324.5,3660 4325,3659.5 R73.2@4325,3639.5 ; C59.2 4275,3532.37 4304.99,3562.36 4304.99,3567.49 4334,3596.5 R73.2@4334,3619.5 ; R73.2@4334,3628.5 R73.2
NetC60_1: C60.1 R76.2 U14.12 | length 287.3
  Top Layer w20: U14.12 C60.1 4125,3905.13 4144,3886.13 4144,3813 4153.5,3803.5 R76.2
NetC61_1: C61.1 C65.2 R85.1 R89.2 | length 560.6
  Top Layer w20: C61.1 2345.5,3858 R89.2@2345.5,3943.5 ; C65.2 2345.5,4004.5 R89.2@2345.5,3943.5 ; C65.2@2345.5,4012.5 2345.5,4020.5 2402.5,4077.5 2568.5,4077.5 2649.5,3996.5 R85.1 ; R89.2 R89.2@2345.5,3943.5
NetC61_2: C61.2 R93.2 U20.3 | length 493.7
  Top Layer w20: C61.2 2537.5,3751.5 2608,3681 2619,3681 2628.5,3671.5 R93.2 ; U20.3 2776.92,3562.5 2751.92,3587.5 2736.53,3587.5 2684.03,3640 2638,3640 R93.2@2628.5,3649.5 ; R93.2@2628.5,3649.5 R93.2 ; R93.2@2628.5,3649.5 R93.2
NetC62_1: C62.1 C66.2 R86.1 R90.2 | length 1863.9
  Top Layer w20: C66.2 2187.5,2950 2349.5,3112 R86.1 2349.5,3134 2340,3143.5 2318.72,3143.5 2307,3155.22 2307,3344.5 2332.14,3369.64 2332.14,3394.64 2357.29,3419.79 C62.1@2382.29,3419.79 ; C62.1 C62.1@2382.29,3419.79 ; R90.2 2646.5,4100.5 2637,4110 2626,4110 2623.5,4112.5 2345.58,4112.5 2272.5,4039.42 2272.5,3823.08 2311.7,3783.88 2379.67,3783.88 2450,3713.55 2450,3487.5 C62.1@2382.29,3419.79
NetC62_2: C62.2 R94.2 U20.5 | length 402.1
  Top Layer w20: C62.2 2589.72,3425 2622.22,3457.5 2756.53,3457.5 2761.53,3462.5 U20.5@2800,3462.5 ; R94.2 2713,3366 2722.5,3375.5 2722.5,3380.97 2782.46,3440.93 2782.46,3444.96 U20.5@2800,3462.5 ; U20.5 U20.5@2800,3462.5
NetC63_1: C63.1 C67.2 C72.1 C73.2 R87.1 R91.2 | length 1507.1
  Top Layer w20: R91.2 2846.5,3121.5 2856,3112 2856,3101 2893.72,3063.28 3127.78,3063.28 3139.5,3075 ; R87.1 3139.5,3075 ; C72.1 3350,3658.43 3345.78,3654.22 3462.5,3537.5 C63.1 3472.07,3515.43 3472.07,3495.56 3487.5,3480.13 3487.5,3310.75 3475,3298.25 C73.2 3481.25,3206.25 C67.2@3481.25,3068.75 ; C67.2 C67.2@3481.25,3068.75 ; 3139.5,3075 3180,3034.5 3180,3023.15 3235.65,2967.5 3380,2967.5 C67.2@3481.25,3068.75
NetC63_2: C63.2 C72.2 R95.2 U20.10 | length 484.7
  Top Layer w20: U20.10 3020.18,3461.81 3143.69,3461.81 R95.2 3161.5,3463 3213,3463 3244.79,3494.79 3244.79,3508.96 3255.41,3519.59 3260.83,3525 C63.2 3262.5,3537.5 3145.78,3654.22 3150,3658.43 C72.2
NetC64_1: C64.1 C68.2 R88.1 R92.2 | length 3088.1
  Top Layer w20: C68.2 2190,2735 2351.92,2735 2354.42,2737.5 2400,2737.5 2550,2887.5 2550,2950 2687.5,3087.5 ; R92.2 2937,3121.5 2927.5,3131 2927.5,3147.5 2905,3170 2770,3170 2687.5,3087.5 ; R88.1 3313,3966 3337.5,3941.5 3337.5,3857.32 3340.43,3854.38 3340.43,3834.57 3355.86,3819.14 3355.86,3769.14 3541.12,3583.88 3541.12,3036.7 3441.92,2937.5 2837.5,2937.5 2687.5,3087.5
NetC64_2: C64.2 R96.2 U20.12 | length 474.8
  Top Layer w20: U20.12 3092.8,3562.5 3116.26,3585.96 3116.26,3603.19 3084.38,3635.06 3084.38,3752.4 3150,3818.02 C64.2 3152.77,3822.23 3152.77,3817.1 3166.37,3803.5 R96.2
NetC69_1: C69.1 P1.4 | length 1136.3
  Top Layer w20: P1.4 4662.5,3762.5 4662.5,3274.22 4674.22,3262.5 4987.5,3262.5 C69.1
NetD1_1: 
NetD1_2: 
NetD2_2: 
NetD3_2: 
NetD4_2: 
NetD4_4: 
NetD5_1: 
NetD5_2: 
NetD7_2: 
NetD8_1: 
NetD9_2: 
NetD10_1: 
NetD10_2: 
NetD11_4: 
NetD12_1: 
NetD13_1: 
NetD15_1: 
NetD16_1: 
NetD17_2: 
NetD18_1: 
NetD18_2: 
NetD19_1: 
NetD19_2: 
NetD23_1: 
NetD23_2: 
NetD25_1: 
NetD25_2: 
NetF1_1: 
NetF1_2: 
NetF2_2: 
NetJack_1: Jack.1 U19.3 | length 1374.4
  Top Layer w20: U19.3 5500,3612.5 5500,3487.5 5275,3262.5 5275,3175 5337.5,3112.5 5437.5,3112.5 5695.62,3370.62 5720.62,3370.62 5725,3375 Jack.1@5725,3475
NetLED1_1: 
NetLED2_1: 
NetLED3_1: LED3.1 R112.2 | length 109.8
  Top Layer w20: R112.2 4843,3337.5 LED3.1
NetP1_2: P1.2 R112.1 | length 424.7
  Top Layer w20: R112.1 4759.78,3335.5 4771.5,3347.22 4771.5,3402.02 4812.5,3443.02 4812.5,3600 4782.65,3629.85 4745.15,3629.85 P1.2
NetP3_1: P3.1 R97.2 R99.2 R101.2 R103.2 | length 4616.6
  Top Layer w20: R99.2@3584,2300 3584,2755.5 3687.5,2859 R97.2 ; R99.2 3588.76,2297.24 3588.76,2254.33 3843.09,2000 4337.5,2000 4405,1932.5 4707.5,1932.5 4769,1994 4769,2065 4778.5,2074.5 R101.2 4778.5,2096.5 4788,2106 5327.76,2106 5471.76,2250 P3.1 ; R101.2@4767.5,2065 4767.5,2145.65 4795,2173.15 4795,2420 4814.61,2439.61 4835.89,2439.61 4855.5,2459.22 4855.5,2649.28 4815.78,2689 4760.22,2689 4748.5,2700.72 4748.5,2790.78 4837.5,2879.78 4837.5,2974.5 4847,2984 R103.2
NetQ1_2: 
NetR4_1: 
NetR14_1: 
NetR20_1: 
NetR20_2: 
NetR21_1: 
NetR22_2: 
NetR25_2: 
NetR26_2: 
NetR29_CW: 
NetR29_W: 
NetR30_1: 
NetR53_2: R53.2 R54.1 U15.2 | length 477.7
  Top Layer w20: R53.2 1357,3997.5 1366.5,3988 1388.28,3988 1400,3976.28 1400,3885.11 1422.5,3862.61 1422.5,3860.22 1434.22,3848.5 1436.61,3848.5 1447.61,3837.5 1515.21,3837.5 1553.5,3799.21 1553.5,3796.5 1575,3775 U15.2 ; R53.2@1359.79,4000 1415,4000 1424.5,4009.5 R54.1
NetR54_2: R54.2 R61.2 R66.1 U15.1 | length 454.1
  Top Layer w20: R66.1 1511.02,3888 1572.83,3826.18 1572.83,3825.78 U15.1@1573.32,3825.29 ; R61.2 R54.2 1559.51,4004.49 1559.51,3900.59 1584.02,3876.08 1584.02,3826.67 1582.63,3825.29 U15.1@1573.32,3825.29 ; U15.1 1605.22,3825.29 U15.1@1573.32,3825.29
NetR55_2: R55.2 R56.1 R62.2 R114.1 U15.6 | length 751.8
  Top Layer w20: R55.2 1366,3409 1375.5,3418.5 1409,3418.5 1423,3432.5 1438.26,3447.76 1449.5,3459 R62.2 1456.24,3454.74 1453.76,3454.74 1574.02,3575 U15.6 ; 1421.5,3434 1443.52,3411.98 1491.25,3411.98 1517.27,3438 1584,3438 1593.5,3428.5 1593.5,3417.5 1635.68,3375.32 1688.68,3375.32 1731.5,3332.5 1731.5,3321.5 1741,3312 R114.1
NetR56_2: R56.2 R109.1 | length 92.7
  Top Layer w20: R56.2 1574.5,3310.5 1663,3310.5 R109.1
NetR57_2: R57.2 R58.1 U15.9 | length 525.5
  Top Layer w20: U15.9 1795.18,3574.31 1833.27,3574.31 1912.57,3495 1951.28,3495 2012.5,3433.78 2012.5,3382.72 2071.5,3323.72 2071.5,3213.5 R58.1
NetR58_2: R58.2 R113.1 | length 80.5
  Top Layer w20: R113.1@2203.5,3130 R58.2
NetR59_2: R59.2 R60.1 U15.13 | length 411.1
  Top Layer w20: U15.13 1826.96,3775 1841.96,3790 1939.42,3790 1941.92,3787.5 1987.78,3787.5 1994.28,3794 1999.5,3794 2009,3803.5 R59.2 2058.75,3814.5 2109.25,3865 2112,3865 2138,3891 R60.1
NetR60_2: R60.2 R64.2 U15.14 U24.5 | length 5280.7
  Top Layer w20: v1(1712.68,2625) 1787.68,2550 3000,2550 3700,1850 v1(3950,1850) ; v1(1737.5,3950) 1737.5,3943.31 1736.81,3942.62 1736.81,3913.19 1769.18,3880.82 1769.18,3826.67 U15.14@1770.85,3825 ; U15.14 U15.14@1770.85,3825 ; R60.2 R60.2@2009,3891 ; R64.2 R60.2@2009,3891 ; v1(3975,2487.5) 3975,2495.62 3958.12,2512.5 3970.62,2525 U24.5 ; U15.14@1770.85,3825 1826.96,3825 1828.95,3826.99 1957.78,3826.99 1969.5,3838.71 1969.5,3853.28 1983.57,3867.36 1985.36,3867.36 R60.2@2009,3891
  Bottom Layer w20: v1(1712.68,2625) 1724.39,2625 1726.6,2627.21 1710,2643.81 1710,3214.42 1721.38,3225.8 1721.38,3920.35 1737.5,3936.47 v1(1737.5,3950) ; v1(3950,1850) 3950,2450.78 3975,2475.78 v1(3975,2487.5)
NetR63_2: R63.2 R68.1 R113.2 U15.8 | length 620
  Top Layer w20: U15.8 1795.67,3523.82 1827.17,3523.82 1856.18,3494.8 1856.98,3494.8 1913.39,3438.39 R63.2@1929.61,3438.39 ; R68.1 1932.5,3228.5 1978.22,3228.5 1982.5,3224.22 ; R63.2 R63.2@1929.61,3438.39 ; R113.2 2071.5,3138 2049.5,3160 2046.72,3160 2035,3171.72 2035,3174.85 1987.35,3222.5 1984.22,3222.5 1982.5,3224.22 ; R63.2@1929.61,3438.39 1940.61,3438.39 1982.5,3396.5 1982.5,3224.22
NetR67_1: R67.1 R109.2 R114.2 U15.7 | length 296.4
  Top Layer w20: U15.7 1629.15,3525 1630.82,3523.33 1630.82,3499.69 1651.73,3478.78 1651.73,3450.5 1661.23,3441 R109.2 R114.2 1753.5,3439.5 1834,3439.5 R67.1
NetR74_2: R74.2 U14.13 U14.14 U24.12 | length 2350.5
  Top Layer w20: U14.13 U14.14 4099.17,4012.5 4108.17,4003.5 4238,4003.5 4247.5,4013 4247.5,4089.42 4298.08,4140 4351.92,4140 4591.12,3900.8 4591.12,3515.29 4218.68,3142.85 4218.68,2656.81 4249.31,2626.18 4280.81,2626.18 U24.12
NetR77_2: R77.2 R78.1 U20.2 | length 975.5
  Top Layer w20: R77.2 2628.5,3557.71 2619,3567.21 2595.29,3567.21 2562.5,3600 2562.5,3684.07 2507.5,3739.07 2507.5,3770.54 2483.88,3794.17 2483.88,3799.2 2472.5,3810.58 2472.5,3876.92 2510.58,3915 2564.42,3915 2602.5,3876.92 2602.5,3839.36 2614.22,3827.64 2640,3827.64 2649.5,3818.14 R78.1 2649.5,3738 2775,3612.5 U20.2
NetR78_2: R78.2 R85.2 R90.1 U20.1 | length 531.2
  Top Layer w20: R90.1 2777,4088 2777,3987 R85.2 2778.5,3974.5 2752.5,3948.5 2750.72,3948.5 2725,3922.78 2725,3822.22 2736.72,3810.5 R78.2 2778.5,3799.5 2809.02,3768.98 2809.02,3664.17 2810.69,3662.5 U20.1
NetR79_2: R79.2 R80.1 U20.6 | length 704.9
  Top Layer w20: R79.2 2447.22,3041 2437.72,3050.5 2437.72,3253.22 2475.5,3291 R80.1 ; R80.1@2485,3302 2485,3322.5 2736.78,3322.5 2752.5,3338.22 2752.5,3365.98 2797.83,3411.32 2829.33,3411.32 U20.6
NetR80_2: R80.2 R98.1 | length 92.7
  Top Layer w20: R80.2 2348,3300.5 2348,3212 R98.1
NetR81_2: R81.2 R82.1 U20.9 | length 361.8
  Top Layer w20: U20.9 3051.96,3412.5 3062.96,3401.5 R81.2@3284,3401.5 ; R81.2 R81.2@3284,3401.5 ; R82.1 3285.5,3324.5 3285.5,3400 R81.2@3284,3401.5
NetR82_2: R82.2 R100.1 | length 777.2
  Top Layer w20: R100.1 3050.5,3124.5 3090,3164 3178.28,3164 3210,3132.28 3210,3035.58 3248.08,2997.5 3301.92,2997.5 3410,3105.58 3410,3317 R82.2
NetR83_2: R83.2 R84.1 U20.13 | length 546.5
  Top Layer w20: R83.2 2912.92,3898 2924.64,3886.28 2924.64,3843.3 2934.5,3833.44 ; 2925,3824.2 2925,3675.49 2986.81,3613.68 3018.3,3613.68 U20.13 ; 2925.13,3824.07 2938.5,3837.44 2978.5,3837.44 2980.56,3839.5 R84.1
NetR84_2: R84.2 R102.1 | length 137.5
  Top Layer w20: R102.1@2862.5,3725 R84.2@2862.5,3862.5
NetR86_2: R86.2 R91.1 R98.2 U20.7 | length 632.6
  Top Layer w20: R86.2 R98.2 2555.5,3287.5 2744.21,3287.5 2782.5,3325.79 2782.5,3345 2800,3362.5 2835.83,3362.5 2837.5,3360.83 2837.5,3252.5 R91.1
NetR87_2: R87.2 R92.1 R100.2 U20.8 | length 318
  Top Layer w20: R92.1 3023.78,3250.5 R100.2@3035.5,3262.22 ; U20.8 3033.83,3362.5 3035.5,3360.83 R100.2@3035.5,3262.22 ; R87.2 R100.2 3039.5,3258.22 R100.2@3035.5,3262.22
NetR88_2: R88.2 R102.2 U20.14 U24.10 | length 4661.8
  Top Layer w20: v1(2937.5,4025) 3043.13,3919.37 3043.13,3808.13 3043.13,3662.5 U20.14 3019.49,3708.51 2991,3737 R102.2 ; v1(2950,2687.5) 3673.83,1963.67 4261.33,1963.67 4372.5,1852.5 v1(4375,1852.5) ; 3044.8,3808.13 3044.8,3847.72 3083.13,3886.04 3083.13,3925.63 3134.5,3977 R88.2 ; U24.10 v1(4375,2525)
  Bottom Layer w20: v1(2937.5,4025) 2950,4012.5 v1(2950,2687.5) ; v1(4375,1852.5) v1(4375,2525)
NetR104_1: R104.1 RP5.2 U19.1 | length 280.5
  Top Layer w20: R104.1 5527.5,3925 U19.1 5618.75,3918.75 5793.75,3918.75 RP5.2
NetR110_1: R110.1 RP6.2 U19.7 | length 337.5
  Top Layer w20: RP6.2 5267.53,3817.53 5305.03,3817.53 U19.7 5314.5,3823 R110.1
NetRP1_3: 
NetRP4_2: 
NetRP5_3: RP5.3 U19.2 | length 192.7
  Top Layer w20: U19.2 5618.75,3818.75 5793.75,3818.75 RP5.3
NetRP6_3: RP6.3 U19.6 | length 365.7
  Top Layer w20: RP6.3 5094.37,3605.63 5193.13,3605.63 U19.6
"Pwr Gnd": 
SDI: *.7 P3.2 | length 1678.5
  Top Layer w20: *.7 4568.69,2587.5 4601.94,2554.25 v1(4615.47,2554.25) ; v1(4987.5,2550) 4987.5,2537.5 5075,2450 P3.2
  Bottom Layer w20: v1(4615.47,2554.25) 4612.62,2554.25 4608.37,2550 v1(4987.5,2550)
W1: *.23 U24.2 | length 578.8
  Top Layer w20: *.23 4162.5,2800 4162.5,2712.99 4125.69,2676.18 4094.2,2676.18 U24.2
W2: *.14 U24.6 | length 524.1
  Top Layer w20: *.14 4062.5,2375 4140.71,2375 4171.32,2405.61 4171.32,2457.43 4153.75,2475 U24.6
W3: *.11 U24.9 | length 388.3
  Top Layer w20: U24.9 4283.17,2473.82 4314.67,2473.82 4385.47,2403.01 4385.47,2277.03 4445.07,2217.43 4445.07,2213.25 4470.82,2187.5 *.11
W4: *.2 U24.13 | length 547.5
  Top Layer w20: U24.13 4283.17,2676.18 4314.67,2676.18 4362.5,2724.02 4362.5,3037.5 4412.5,3087.5 *.2
pads on no net: *.17 *.18 *.19 *.20 Jack.2 P1.1 P1.5

## Polygon pours and split planes (outlines as drawn)
GND on Top Layer "GND_L01_P002" (solid, pour order 2): 1037.5,4375 6312.5,4375 6312.5,1475 1037.5,1475
no net on Top Layer "NONET_L01_P001" (solid, pour order 1): 5187.5,2212.5

## Silkscreen, mask and mechanical layers (free items; w line width, h text height)
Top Overlay:
  lines w10: 1037.5,1475 1037.5,4375 6312.5,4375 6312.5,1475 1037.5,1475

## Dimensions
6437.5,4375 to 6537.5,1462.5 on Top Layer
1037.5,1412.5 to 6325,1287.5 on Top Layer

## Text inside footprints (layer, text, board x,y; h text height)
C69: Top Overlay "+" at 5116.5,3447.5 h60
C70: Top Overlay "+" at 5333.5,4102.5 h60 r180
C71: Top Overlay "+" at 4904,4172.5 h60